# Altium PCB PCB.PcbDoc
Units mm, origin at the board's own origin, x right, y up, seen from the top; angles counter-clockwise.
Board outline 40 x 70 mm, 2 copper layers (Top Layer, Bottom Layer), stack 1.571 mm thick; 31 components, 24 nets, 138 pads, 19 vias.
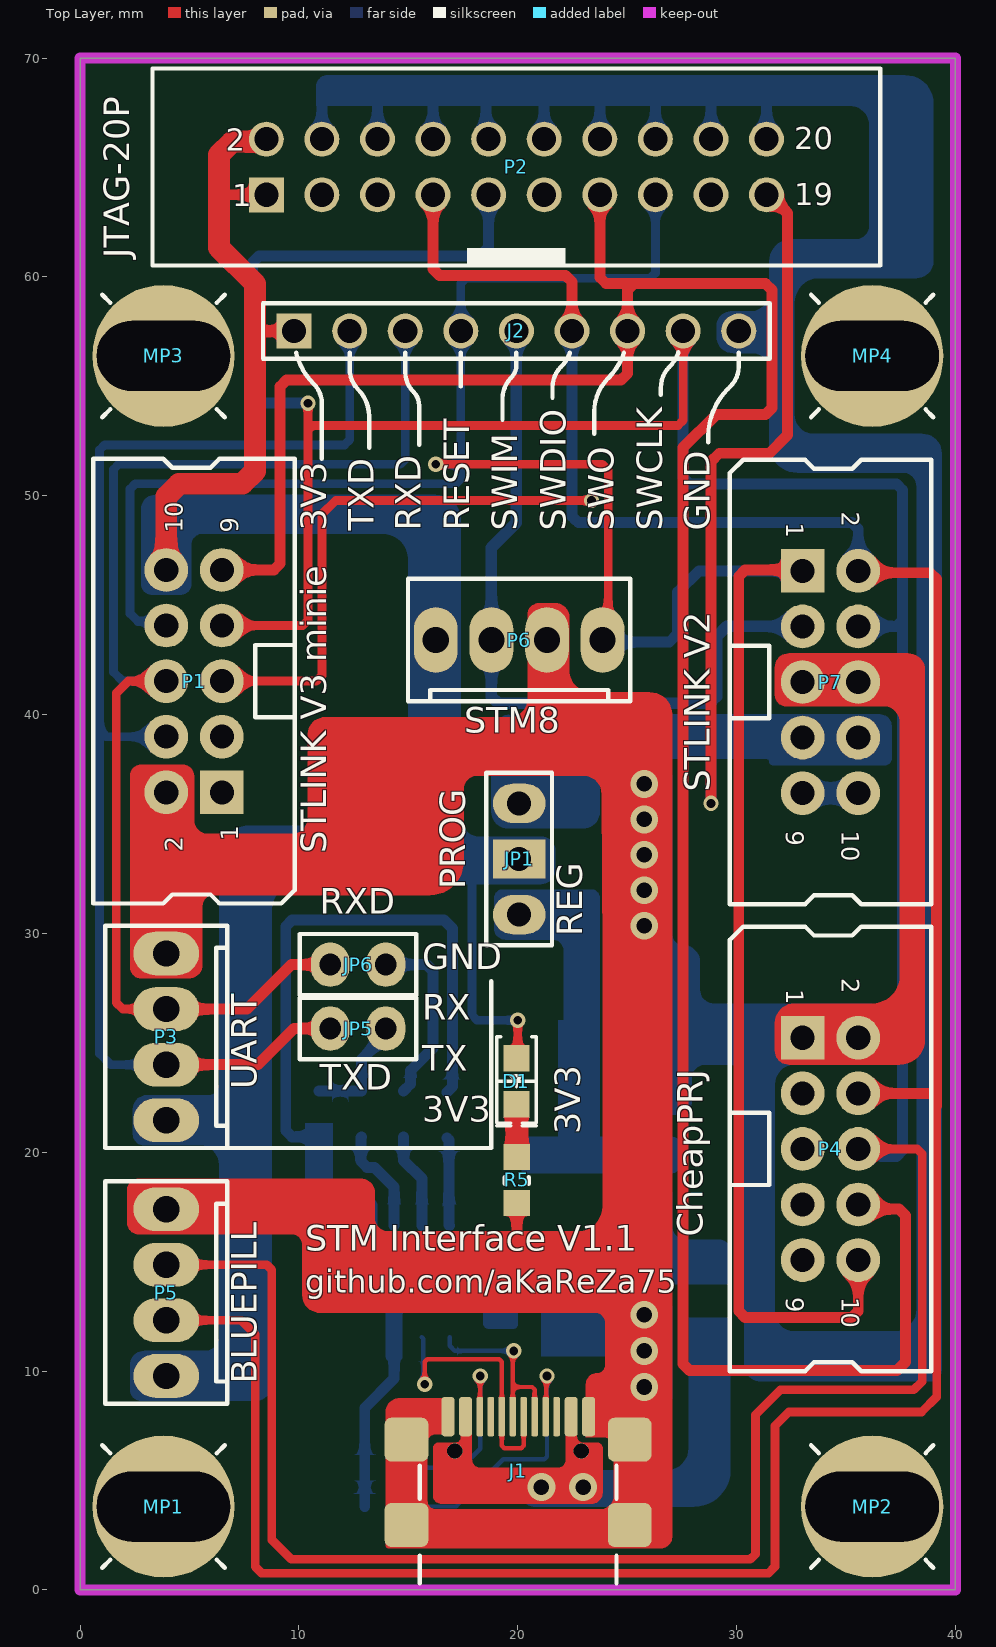
[diagram p0: Top Layer view]
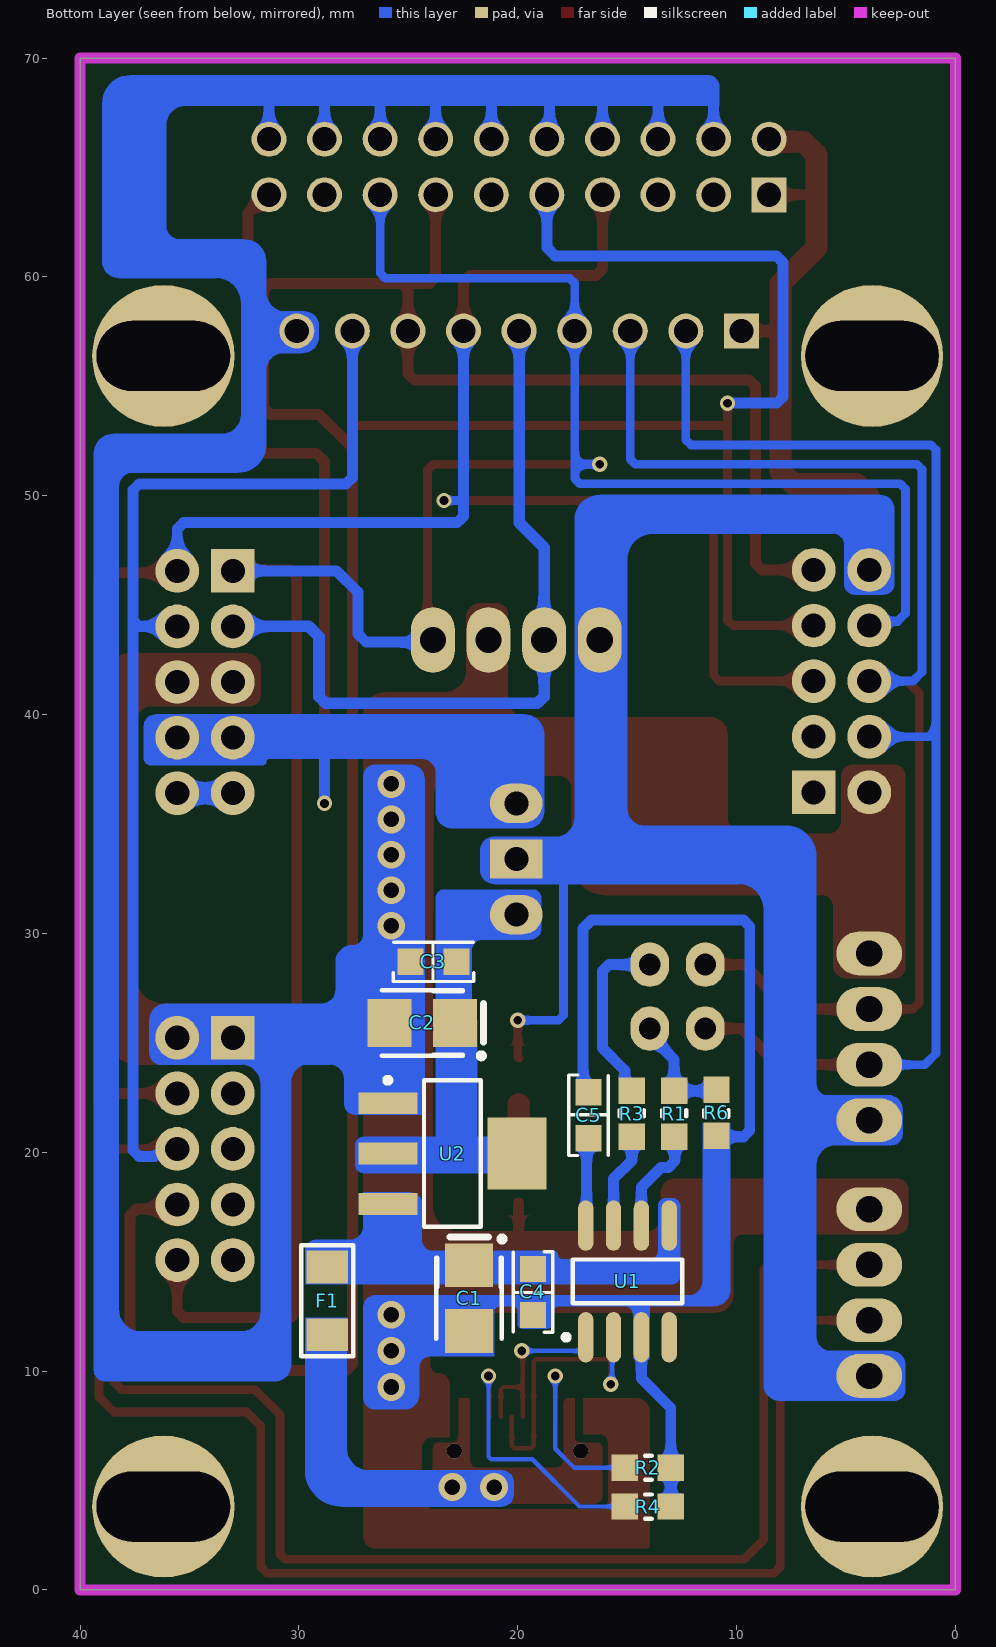
[diagram p1: Bottom Layer view, seen from below]
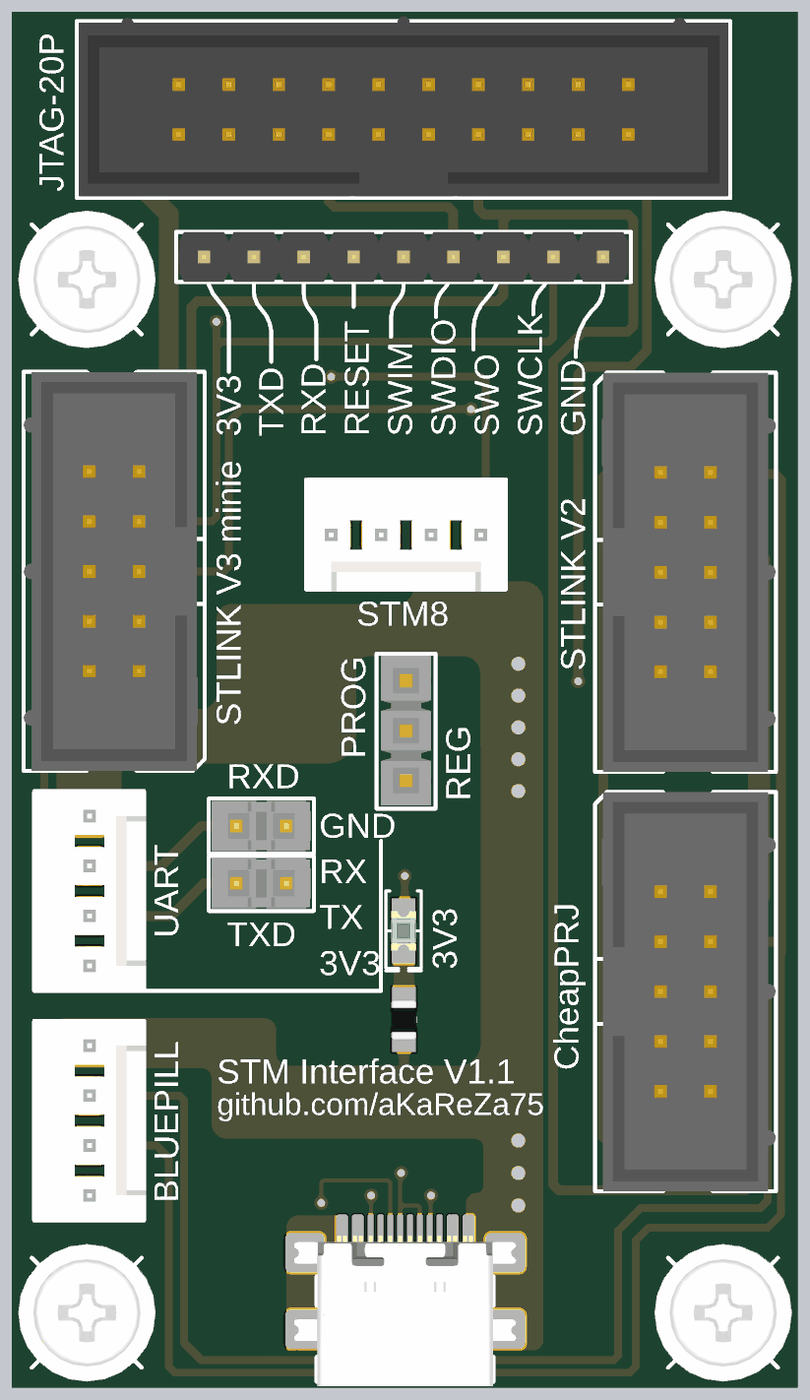
[diagram p2: 3D render of the assembled board from above, using the file's embedded part models]
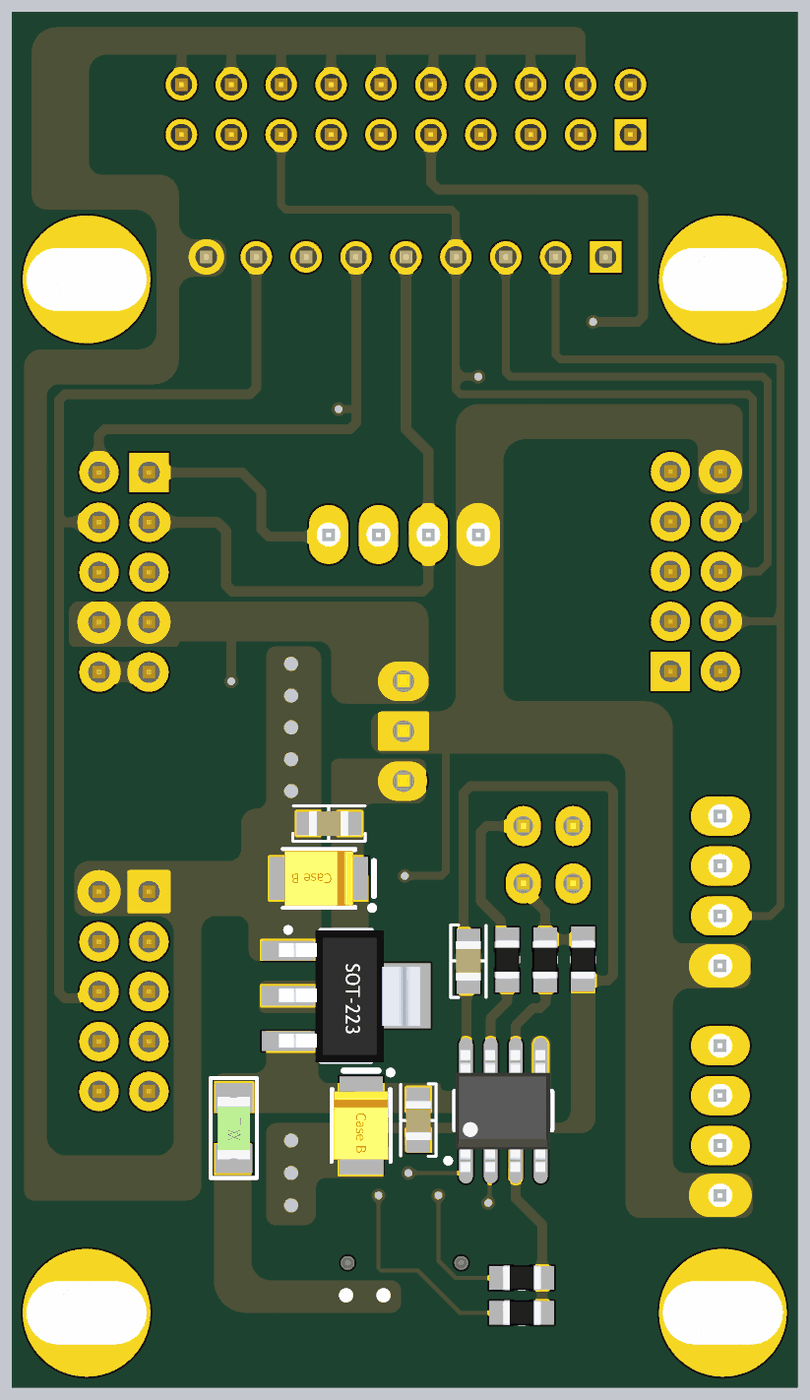
[diagram p3: 3D render of the assembled board from below, using the file's embedded part models]

## Layer stack, top to bottom
Top Solder: solder mask 0.0102, Solder Resist, Dk 3.5
Top Layer: signal copper 0.0356
Dielectric 1: dielectric 1.5, FR-4, Dk 4.8
Bottom Layer: signal copper 0.0356
Bottom Solder: solder mask 0.0102, Solder Resist, Dk 3.5

## Board outline
0,0 0,70 40,70 40,0

## Design rules (kind name [scope] priority, off if disabled: settings)
AcuteAngle [All] p1: minimum=6.00000000000000E+0001 checktracksonly=TRUE
AssemblyTestPointUsage [All] p1 off:
AssemblyTestpoint [All] p1 off: testpointundercomponent=TRUE minsize=1.016 maxsize=2.54 preferedsize=1.524 minholesize=0 maxholesize=1.016 preferedholesize=0.813 testpointgrid=0.025 usegrid=TRUE gridtolerance=0 allowsidetop=TRUE allowsidebottom=TRUE
BoardOutlineClearance [All] p1: gap=0.2 ignorepadtopadclearanceinfootprint=FALSE
Clearance Poly_Clearance [All vs InPolygon] p1: gap=0.25 ignorepadtopadclearanceinfootprint=TRUE except(0.3: Arc-Hole Track-Hole SMDPad-Hole THPad-Hole Via-Hole Fill-Hole Poly-Hole Region-Hole Text-Hole)
Clearance [All] p2: gap=0.2 ignorepadtopadclearanceinfootprint=FALSE except(0.3: Arc-Hole Track-Hole SMDPad-Hole THPad-Hole Via-Hole Fill-Hole Poly-Hole Region-Hole Text-Hole)
FabricationTestPointUsage [All] p1 off: valid=0 allowmultiple=FALSE
FabricationTestpoint [All] p1 off: side=3 testpointundercomponent=TRUE minsize=1.016 maxsize=2.54 preferedsize=1.524 minholesize=0 maxholesize=1.016 preferedholesize=0.813 testpointgrid=0.025 allowsidetop=TRUE allowsidebottom=TRUE usegrid=TRUE gridtolerance=0
HoleSize [All] p1: absolutevalues=TRUE maxlimit=10 minlimit=0.4 maxpercent=80.000 minpercent=20.000
HoleToHoleClearance [All] p1: gap=0.3 allowstackedmicrovias=TRUE
MinimumAnnularRing [All] p1: minimumring=0.15
MinimumSolderMaskSliver [All] p1: minsoldermaskwidth=0.01
PolygonConnect [All] p1: thpad.connectstyle=Relief thpad.reliefconductorwidth=0.4 thpad.reliefentries=4 thpad.polygonreliefangle="90 Angle" thpad.airgapwidth=0.4 smdpad.connectstyle=Relief smdpad.reliefconductorwidth=0.4 smdpad.reliefentries=4 smdpad.polygonreliefangle="90 Angle" smdpad.airgapwidth=0.4 via.connectstyle=Direct via.reliefconductorwidth=0.254 via.reliefentries=4 via.polygonreliefangle="90 Angle" via.airgapwidth=0.254
RoutingVias [All] p1: holewidth=0.4 width=0.7 viastyle="Through Hole" minholewidth=0.4 minwidth=0.7 maxholewidth=3 maxwidth=6
SMDNeckDown [All] p1: percent=50.000
SilkToSilkClearance [All] p1: silktosilkclearance=0
SilkToSolderMaskClearance [IsPad] p1: minsilkscreentomaskgap=0.01 clearancetoexposedcopper=TRUE
SolderMaskExpansion [All] p1: expansion=0.102 istentingtop=FALSE
Width [All] p1: maxlimit=10 minlimit=0.2 preferedwidth=0.4
21 further rules are at their usual default settings.

## Components (designator, comment, footprint, x,y, rotation, side; value= is the part's Value field where it differs from the comment)
C1 "10u" SMT_C_Tantalum_B 22.225,13.335 r270 bottom
C2 "10u" SMT_C_Tantalum_B 24.363,25.908 r0 bottom
C3 "100n" "CAP 0805/2012" 23.876,28.702 r0 bottom
C4 "DS1307" "CAP 0805/2012" 19.304,13.589 r270 bottom value=100n
C5 "10n" "CAP 0805/2012" 16.764,21.717 r90 bottom
D1 "Green" "LED 0805/2012 GREEN" 19.939,23.241 r270 top
F1 "0.25A" 1206_F 28.702,13.208 r90 bottom
J1 "16b" "USBC_SMD_16_USB4110 - Extended" 19.812,7.112 r180 top locked
J2 "9" HDR_THT_9M_2.54mm 19.939,57.531 r0 top
JP1 "0b" "jumper selector" 20.066,30.861 r90 top
JP5 "2'Pin" "Jumper Small - 2.54 - GRAY" 12.7,25.654 r180 top
JP6 "2'Pin" "Jumper Small - 2.54 - GRAY" 12.7,28.575 r180 top
MP1 "M3" SCREW-M3 3.81,3.81 r0 top
MP2 "M3" SCREW-M3 36.195,3.81 r0 top
MP3 "M3" SCREW-M3 3.81,56.388 r0 top
MP4 "M3" SCREW-M3 36.195,56.388 r0 top
P1 "STLinkV3-minie" IDC2.54-10PIN 5.207,41.529 r90 top
P2 "JTAG-20P" BOX-HDR-10X2-2.54mm-S 19.939,65.024 r0 top
P3 "UART" "MOLEX KK 0022272041" 3.937,25.273 r90 top
P4 "STLINK V2" IDC2.54-10PIN 34.29,20.153 r270 top
P5 "BluePill" "MOLEX KK 0022272041" 3.937,13.589 r90 top
P6 "STM8" "MOLEX KK 0022272041" 20.066,43.407 r0 top
P7 "STLinkV2" IDC2.54-10PIN 34.29,41.489 r270 top
R1 "560b" "RES 0805 (2012X06L)" 12.854,22.606 r270 bottom
R2 "4.7K" "RES 0805 (2012X06L)" 13.208,5.588 r0 bottom
R3 "560b" "RES 0805 (2012X06L)" 14.786,22.606 r270 bottom
R4 "4.7K" "RES 0805 (2012X06L)" 13.208,3.81 r0 bottom
R5 "220b" "RES 0805 (2012X06L)" 19.958,17.882 r90 top
R6 "1K" "RES 0805 (2012X06L)" 10.922,20.955 r90 bottom
U1 "CH340N" SO8_narrow_m 14.986,14.097 r90 bottom
U2 "AMS1117-3V3" SOT223_M 22.987,19.939 r180 bottom

## Footprints (in the part's own frame and the unit in brackets; to place one, negate y for a bottom-side part, rotate by r counter-clockwise, add the part's x,y. Pads: shape width x height; smd on the part's side, far side on the other; paste and mask are expansions set on the pad)
1206_F [mm] "Surface mount FUSE 1206"
  rect 1.5x1.9 smd: 1(-1.55,0) 2(1.55,0)
  silkscreen extent -2.54,-1.18 2.54,1.18, body extent -1.6,-0.83 1.6,0.83, height 0.56
BOX-HDR-10X2-2.54mm-S [mm] "20 pins, straight, gold plating"
  rect 1.6x1.6 hole 1.1: 1(-11.43,-1.27)
  round 1.6 hole 1.1: 2(-11.43,1.27) 3(-8.89,-1.27) 4(-8.89,1.27) 5(-6.35,-1.27) 6(-6.35,1.27) 7(-3.81,-1.27) 8(-3.81,1.27) 9(-1.27,-1.27) 10(-1.27,1.27) 11(1.27,-1.27) 12(1.27,1.27) 13(3.81,-1.27) 14(3.81,1.27) 15(6.35,-1.27) 16(6.35,1.27) 17(8.89,-1.27) 18(8.89,1.27) 19(11.43,-1.27) 20(11.43,1.27)
  silkscreen extent -16.63,-4.5 16.63,4.5, body extent -16.53,-4.42 16.53,4.75, height 9.13
"CAP 0805/2012" [mm] "Chip Capacitor, 2-Leads, Body 2.00x1.20mm, IPC Medium Density"
  rect 1.2x1.2 smd: 1(-1.075,0) 2(1.025,0)
  silkscreen extent -1.86,-0.9 1.82,0.9, body extent -1,-0.64 1,0.64, height 1.26
HDR_THT_9M_2.54mm [mm] "Pin Header, pitch 2.54 mm, THT, Vertical, single row, 9p"
  rect 1.6x1.6 hole 1.1: 1(-10.16,0)
  round 1.6 hole 1.1: 2(-7.62,0) 3(-5.08,0) 4(-2.54,0) 5(0,0) 6(2.54,0) 7(5.08,0) 8(7.62,0) 9(10.16,0)
  silkscreen extent -11.58,-1.27 11.58,1.27, body extent -11.43,-1.27 11.43,1.27, height 8.57
IDC2.54-10PIN [mm] "Connector; IDC, Low Profile Male Header, Thru-Hole; 10 Position; Vertical; Pitch 2.54 mm; 20.32 x 9.2 x 9.45 mm (LxWxH) DESIGNER : ABBAS BASEREH"
  rect 2x2 hole 1.1: 1(-5.08,-1.27)
  round 2 hole 1.1: 2(-5.08,1.27) 3(-2.54,-1.27) 4(-2.54,1.27) 5(0,-1.27) 6(0,1.27) 7(2.54,-1.27) 8(2.54,1.27) 9(5.08,-1.27) 10(5.08,1.27)
  silkscreen extent -10.16,-4.6 10.16,4.6, body extent -10.15,-4.25 10.15,4.6, height 9.17
"jumper selector" [mm]
  oval 1.8x2.4 hole 1.1: 1(0,0) 3(5.08,0)
  rect 1.8x2.4 hole 1.1: 2(2.54,0)
  silkscreen extent -1.4,-1.5 6.48,1.5, body extent -1.24,-1.27 6.38,1.27, height 10.16
"Jumper Small - 2.54 - GRAY" [mil]
  oval 70x80 hole 39.37: 1(-50,0) 2(50,0)
  silkscreen extent -105,-55 105,55, body extent -100,-50 100,50, height 337
"LED 0805/2012 GREEN" [mm] "Chip Diode, 2-Leads, Body 2.00x1.25mm, IPC Medium Density"
  rect 1.2x1.2 smd: 1(-1.05,0) 2(1.05,0)
  silkscreen extent -2.03,-0.9 2.03,0.9, body extent -1,-0.62 1,0.63, height 0.9
"MOLEX KK 0022272041" [mm]
  oval 2x3 hole 1.2: 1(-3.81,0) 2(-1.27,0) 3(1.27,0) 4(3.81,0)
  silkscreen extent -5.08,-2.79 5.08,2.79, body extent -5.08,-2.9 5.08,2.9, height 11.7
"RES 0805 (2012X06L)" [mm] "Chip Resistor, 2-Leads, Body 2.0x1.3mm, IPC High Density _ (0.100 W)"
  rect 1.2x1.2 smd: 1(-0.2,0) 2(1.9,0)
  silkscreen extent 0.67,-0.55 0.98,0.55, body extent -0.19,-0.63 1.84,0.64, height 0.6
SCREW-M3 [mm]
  round 6.5 hole 3.2 slot 6.096 at 0 deg: 1(0,0)
  silkscreen extent -2.79,-2.79 2.79,2.79, body extent -3.49,-3.5 3.51,3.5, height 2.32
SMT_C_Tantalum_B [mm] "Capacitor, SM Tantalum; Body 3.5 x 2.8 mm (LxW typ)"
  rect 2x2.2 smd: 1(-1.5,0) 2(1.5,0)
  silkscreen extent -2.82,-1.5 1.85,1.62, body extent -1.75,-1.4 1.75,1.4, height 1.9
SO8_narrow_m [mm] "8-Pin Small Outline Package (SO8), IPC Low Density"
  oval 2.3x0.7 smd: 1(-2.55,1.905) 2(-2.55,0.635) 3(-2.55,-0.635) 4(-2.55,-1.905) 5(2.55,-1.905) 6(2.55,-0.635) 7(2.55,0.635) 8(2.55,1.905)
  silkscreen extent -2.67,-2.5 1,2.93, body extent -3.12,-2.39 3.07,2.44, height 1.7
SOT223_M [mm] "SOT223, 4-Leads, Body 6.5x3.5mm, Pitch 2.3mm, Lead Span 7mm, IPC Low Density"
  rect 2.7x1 smd: 1(-2.95,2.3) 2(-2.95,0) 3(-2.95,-2.3)
  rect 2.7x3.3 smd: 4(2.95,0)
  silkscreen extent -3.08,-3.35 1.3,3.47, body extent -3.42,-3.38 3.78,3.32, height 1.85
"USBC_SMD_16_USB4110 - Extended" [mm] "CONN, USB, Type C, USB4110"
  rrect50% 0.6x1.8 smd mask+0.075: A1B12(2.997,-0.805) A4B9(2.197,-0.805) B1A12(-3.428,-0.805) B4A9(-2.628,-0.805)
  rrect50% 0.3x1.8 smd mask+0.075: A5(1.043,-0.805) A6(0.041,-0.805) A7(-0.46,-0.805) A8(-1.461,-0.805) B5(-1.962,-0.805) B6(-0.961,-0.805) B7(0.542,-0.805) B8(1.544,-0.805)
  rrect30% 2x2 smd: S1(4.897,0.244) S2(-5.303,0.244) S3(4.897,4.144) S4(-5.303,4.144)
  round 0.7 hole 0.7 unplated: ""(-3.093,0.764) ""(2.687,0.764)
  silkscreen extent -4.7,1.45 4.3,6.81, body extent -5.85,-0.64 5.45,7.04, height 3.23

## Part data
C1 C2: library part Cap_Tantalum, "Tantalum Capacitor,TAJ Series-SMD", Package=Package?, Rating=6.3V, Inflow=inflow?, Type=Tantalum, Validation=Valid
C3 C4 C5: library part Cap_Multi_SMD_100nF_0805, "Bipolar ceramic capacitor SMD", Package=0805, Rating=50V, Inflow=inflow?, Type=MultiLayer
  C3: Validation=Valid
D1: library part Semi_LED_SMD, "LED", Package=Package?, Rating=Rating?, Inflow=inflow?, Type=LED, Validation=Valid
F1: library part Other_Elec_Fuse_SMD, "Short circiut  protection", Package=1206, Rating=Rating?, Inflow=0.5A, Type=Fast
J1: library part Con_USB_C_16P, "USB C Female Connector", Package=SMD, Rating=Rating?, Inflow=inflow?, Type=C, Validation=NT
J2: library part Con_MPH_9x1_V_THT_2.54, "Header, single row, 9 pin", Package=Package?, Rating=Rating?, Inflow=7152, Type=Type?, Validation=NT
JP1: library part SW_Other_JSelector_THT, "Jumper Selector", Package=Dip, Rating=Rating?, Inflow=5145, Type=Selector, Validation=Valid
JP5 JP6: library part SW_Other_Jumper, "Jumper", Package=Package?, Rating=Rating?, Inflow=5145, Type=Type?, Validation=Valid
MP1 MP2 MP3 MP4: library part Other_Mech_Screw, "Board Screw With Spacer", Package=Package?, Rating=Rating?, Inflow=8243, Type=Screw, Validation=Valid
P1: library part Con_Prog_STLinkV3_SWD, "STLINK-V3MINIE debugger/programmer IDC probe for STM32 microcontrollers", Package=Package?, Rating=Rating?, Inflow=7119, Type=SWD, Validation=NT
P2: library part Con_Prog_JTAG_20, "20 Pin Standard JTAG Header For ARM JLINK", Package=Package?, Rating=Rating?, Inflow=7134, Type=Type?, Validation=NT
P3: library part Con_UART, "UART Connector", Package=Package?, Rating=Rating?, Inflow=4528, Type=Type?, Validation=NT
P4: library part Con_Prog_CheapProject, "STLINK-V2 debugger/programmer IDC probe for STM32 microcontrollers", Package=Package?, Rating=Rating?, Inflow=7119, Type=SWD, Validation=NT
P5: library part Con_Prog_BluePill, "Serial Wire 4'pin", Package=Package?, Rating=Rating?, Inflow=4528, Type=Type?, Validation=NT
P6: library part Con_Prog_STM8, "STM8 Programmer Connector", Package=Package?, Rating=Rating?, Inflow=4528, Type=Type?, Validation=NT
P7: library part Con_Prog_STLinkV2, "STLINK-V2 debugger/programmer IDC probe for STM32 microcontrollers", Package=Package?, Rating=Rating?, Inflow=7119, Type=SWD, Validation=NT
R1 R2 R3 R4 R5 R6: library part Res_SMD_0805, "Resistor", Package=0805, Rating=0.125W, Inflow=inflow?, Type=10%
  R5: Validation=Valid
U1: library part IC_Converter_CH340N, "TTL To USB Chip", Package=SO-8, Rating=Rating?, Inflow=inflow?, Type="USB to TTL"
U2: library part IC_Reg_AMS1117_3.3, "1'A Positive voltage regulator", Package=SOT223, Rating=1A, Inflow=5217, Type=LDO, Validation=Valid

## Via types
v1: diameter 1.27, hole 0.711, Top Layer to Bottom Layer, tented both sides, 10 vias
v2: diameter 0.7, hole 0.4, Top Layer to Bottom Layer, tented both sides, 9 vias

## Nets (pads, with @x,y where several pads share a name; then routed paths per layer and width w, separated by ;. In a path a pad name is that pad's centre, name@x,y a point inside that pad or via, vN(x,y) a via of type N, cw(c..) or ccw(c..) an arc to the next point about the centre after c; other vN are vias at no path point)
+3V3: D1.1 J2.1 JP1.2 P1.10 P2.1 P2.2 P3.1 P5.1 P6.1 | length 59.1
  Top Layer w0.4: D1.1 20,24.352 v2(20,26.035)
  Top Layer w0.5: 6.35,63.627 6.477,63.754 P2.1 ; 8.001,57.531 J2.1
  Top Layer w1: P1.10 3.937,49.96 4.523,50.546 7.415,50.546 8.001,51.132 8.001,57.531 8.001,59.69 6.35,61.341 6.35,63.627 6.35,65.581 6.948,66.179 8.394,66.179 P2.2
  Bottom Layer w0.4: P1.10 3.937,48.26 4.699,49.022 15.387,49.022 16.256,48.153 P6.1 ; 17.907,32.512 17.907,26.269 18.141,26.035 v2(20,26.035)
GND: C1.2 C2.2 C3.2 C4.2 C5.2 J1.A1B12 J1.B1A12 J1.S1 J1.S2 J1.S3 J1.S4 J2.9 P1.2 P2.4 P2.6 P2.8 P2.10 P2.12 P2.14 P2.16 P2.18 P2.20 P3.4 P4.1 P4.2 P5.4 P6.3 P7.5 P7.6 R2.1 R4.1 R5.1 R6.1 U1.3 U2.1 | length 61
  Top Layer w0.5: 19.685,15.875 19.958,15.875 R5.1
  Top Layer w0.8: J1.S3 J1.S1 ; J1.S4 25.115,5.145 ; 25.115,5.168 J1.S2
  Bottom Layer w0.5: R6.1@10.922,20.706 9.691,20.706 9.398,20.999 9.398,30.314 9.691,30.607 16.637,30.607 17.018,30.226 17.018,22.996 C5.2 ; P2.4 11.049,68.128 ; R4.1 R2.1 13.008,8.309 14.351,9.652 U1.3 ; P2.6 13.589,68.072 ; P2.8 16.129,68.072 ; 18.542,68.072 18.542,66.294 P2.10 ; P2.12 21.209,68.023 ; 23.622,68.199 23.749,68.199 P2.14 ; P2.16 26.289,68.072 ; P2.18 28.829,68.072 ; P2.20 31.369,68.072
  other v1: 25.781,9.271 25.781,10.922 25.781,12.573 25.781,30.353 25.781,31.972 25.781,33.591 25.781,35.211 25.781,36.83
NetC2_1: C2.1 C3.1 JP1.1 U2.2 U2.4
NetC5_1: C5.1 U1.8 | length 4
  Bottom Layer w0.5: C5.1 16.853,20.553 16.853,16.685 U1.8
NetD1_2: D1.2 R5.2 | length 9.7
  Top Layer w1: D1.2 D1.2@19.958,22.191 ; R5.2 D1.2@19.958,22.191 ; R5.2 D1.2@19.958,22.191 ; R5.2 D1.2@19.958,22.191 ; R5.2 D1.2@19.958,22.191
NetF1_1: F1.1 J1. J1.A4B9 J1.B4A9
  other v1: 21.082,4.699 22.987,4.699
NetJ1_A6: J1.A6 J1.B6 U1.1 | length 8.7
  Top Layer w0.2: J1.A6 19.771,9.271 ; v2(19.812,10.922) 19.771,10.881 19.771,9.271 ; J1.B6 20.773,9.154 20.655,9.271 19.771,9.271
  Bottom Layer w0.2: U1.1 16.891,11.153 17.122,10.922 v2(19.812,10.922)
NetJ1_A7: J1.A7 J1.B7 U1.2 | length 13.1
  Top Layer w0.2: v2(15.748,9.398) 15.748,10.424 15.865,10.541 19.153,10.541 19.27,10.424 J1.B7 19.27,6.594 19.387,6.477 20.154,6.477 20.272,6.594 J1.A7
  Bottom Layer w0.2: U1.2 15.684,11.483 15.684,9.461 v2(15.748,9.398)
NetJ1_A8: J1.A8 R4.2 | length 12.8
  Top Layer w0.2: J1.A8 21.305,7.949 21.305,9.748 v2(21.336,9.779)
  Bottom Layer w0.2: R4.2 17.183,3.81 19.342,5.969 21.219,5.969 21.336,6.086 v2(21.336,9.779)
NetJ1_B8: J1.B8 R2.2 | length 8.7
  Top Layer w0.2: J1.B8 18.278,7.927 18.278,9.769 v2(18.288,9.779)
  Bottom Layer w0.2: R2.2 17.426,5.588 18.288,6.45 v2(18.288,9.779)
NetJP5_1: JP5.1 R1.1 R6.2 | length 5.2
  Bottom Layer w0.5: R6.2@10.922,22.806 R1.1 12.854,24.241 13.97,25.357 JP5.1
NetJP6_1: JP6.1 R3.1 | length 8.3
  Bottom Layer w0.5: JP6.1 15.836,28.575 16.129,28.282 16.129,24.765 15.108,23.744 15.108,23.128 R3.1
NetP7_9,10: P7.9 P7.10 | length 2.5
  Bottom Layer w1: P7.9 P7.10
NetR1_2: R1.2 U1.6 | length 4.9
  Bottom Layer w0.5: R1.2 12.827,20.679 12.827,19.597 13.12,19.304 13.462,19.304 14.351,18.415 U1.6
NetR3_2: R3.2 U1.7 | length 4.4
  Bottom Layer w0.5: R3.2 14.786,19.631 15.621,18.796 U1.7
RESET: J2.4 P1.8 P2.15 P4.10 P6.4 P7.1 | length 117.8
  Top Layer w0.4: v2(16.256,51.435) 23.862,51.435 24.13,51.167 24.13,43.661 P6.4
  Top Layer w0.5: P7.1 32.98,46.609 30.392,46.609 30.099,46.316 30.099,12.739 30.392,12.446 35.267,12.446 35.56,12.739 P4.10
  Bottom Layer w0.4: P1.8 3.748,44.258 2.644,44.258 2.286,44.616 2.286,50.312 2.52,50.546 17.165,50.546 17.399,50.78 17.399,51.435 ; v2(16.256,51.435) 17.399,51.435 ; P2.15 26.289,60.178 26.055,59.944 17.633,59.944 17.399,59.71 J2.4 17.399,51.435
  Bottom Layer w0.5: P6.4 23.976,43.307 26.924,43.307 27.305,43.688 27.305,45.593 28.281,46.569 P7.1
RXD: J2.3 JP6.2 P1.6 P3.3 | length 58.8
  Top Layer w0.4: P3.3 1.944,26.543 1.651,26.836 1.651,40.982 2.198,41.529 P1.6
  Top Layer w0.5: P3.3 7.62,26.543 9.652,28.575 JP6.2
  Bottom Layer w0.4: P3.3 P3.3@4.064,26.416 ; P1.6 1.944,41.529 1.524,41.949 1.524,51.201 1.758,51.435 14.625,51.435 14.859,51.669 J2.3
SWCLK: J2.8 P1.7 P2.9 P4.6 P5.3 P7.4 | length 177.3
  Top Layer w0.4: P5.3 8.529,14.859 8.763,14.625 8.763,2.286 9.652,1.397 30.627,1.397 30.861,1.631 30.861,8.001 32.004,9.144 38.1,9.144 38.481,9.525 38.481,19.919 38.247,20.153 P4.6 ; P1.7 10.18,44.069 10.414,44.303 10.414,52.979 ; v2(10.414,54.229) 10.414,52.979 ; J2.8 27.559,53.447 27.325,53.213 10.648,53.213 10.414,52.979
  Bottom Layer w0.5: v2@10.42,54.229 8.167,54.229 7.874,54.522 7.874,60.667 8.167,60.96 18.288,60.96 18.669,61.341 P2.9 ; J2.8 27.559,50.839 27.852,50.546 37.299,50.546 37.592,50.253 37.592,44.322 ; P4.6 35.56,19.812 35.614,19.866 36.549,19.866 36.603,19.812 37.299,19.812 37.592,20.105 37.592,44.322 ; P7.4 37.299,44.029 37.592,44.322
SWDIO: J2.6 P1.5 P2.7 P4.4 P5.2 P7.2 | length 159.5
  Top Layer w0.4: P5.2 7.366,12.319 8.001,11.684 8.001,1.055 8.294,0.762 31.457,0.762 31.75,1.055 31.75,7.493 32.385,8.128 38.45,8.128 39.142,8.819 39.142,22.119 ; P1.5 10.795,41.529 11.049,41.783 11.049,49.149 11.684,49.784 v2(23.368,49.784) ; 39.029,22.693 39.142,22.58
  Top Layer w0.5: P2.7 16.129,60.364 16.422,60.071 22.186,60.071 22.479,59.778 J2.6 ; P4.4 39.029,22.693 ; P7.2 35.647,46.482 38.849,46.482 39.142,46.189 39.142,22.119
  Bottom Layer w0.4: 22.479,49.784 v2(23.368,49.784) ; 22.645,48.895 22.772,48.768
  Bottom Layer w0.5: J2.6 22.479,49.784 22.479,49.061 22.645,48.895 ; 22.772,48.768 35.267,48.768 35.56,48.475 P7.2
SWIM: J2.5 P6.2 P7.3 | length 34.6
  Bottom Layer w0.53: J2.5 19.939,48.768 18.796,47.625 P6.2 18.796,40.823 19.106,40.513 28.773,40.513 29.083,40.823 29.083,43.561 29.551,44.029 P7.3
SWO: J2.7 P1.9 P2.13 P4.8 | length 114.7
  Top Layer w0.5: P1.9 8.851,46.609 9.144,46.902 9.144,54.991 9.437,55.284 24.726,55.284 25.019,55.577 J2.7 25.019,59.397 25.312,59.69 ; P2.13 23.749,59.983 24.042,59.69 25.312,59.69 ; P4.8 35.774,17.399 37.426,17.399 37.719,17.106 37.719,10.414 37.338,10.033 27.852,10.033 27.559,10.326 27.559,52.197 29.083,53.721 31.33,53.721 31.623,54.014 31.623,59.397 31.33,59.69 25.312,59.69
TXD: J2.2 JP5.2 P1.4 P3.2 | length 58.8
  Top Layer w0.5: P3.2 8.128,24.003 9.779,25.654 JP5.2
  Bottom Layer w0.4: P3.2 1.397,24.003 0.889,24.511 0.889,39.282 ; P1.4 1.182,38.989 0.889,39.282 ; J2.2 12.319,52.558 12.085,52.324 1.123,52.324 0.889,52.09 0.889,39.282
VProg: JP1.3 P2.19 P7.7 P7.8 | length 36
  Top Layer w0.5: v2(28.829,35.941) 28.829,51.562 29.21,51.943 31.496,51.943 32.323,52.77 32.323,62.93 31.499,63.754 P2.19
  Bottom Layer w0.5: v2(28.829,35.941) 28.829,38.354
  Bottom Layer w1: P7.7 P7.8
Vusb: C1.1 C4.1 F1.2 U1.5 U2.3
pads on no net: J1.A5 J1.B5 MP1.1 MP2.1 MP3.1 MP4.1 P1.1 P1.3 P2.3 P2.5 P2.11 P2.17 P4.3 P4.5 P4.7 P4.9 U1.4

## Keep-outs
Keep-Out Layer:
  the board outline again, w0.5

## Other copper
Top Layer:
  region net GND: 26.543,1.905 ccw(c26.543,2.413) 27.051,2.413 27.051,6.985 27.051,9.906 27.051,11.43 27.051,40.005 ccw(c26.035,40.005) 26.035,41.021 23.368,41.021 cw(c23.368,42.037) 22.352,42.037 22.352,44.45 ccw(c21.717,44.45) 21.717,45.085 20.955,45.085 ccw(c20.955,44.577) 20.447,44.577 20.447,40.706 cw(c19.619,40.706) 19.619,39.878 11.176,39.878 ccw(c11.176,39.116) 10.414,39.116 10.414,35.306 cw(c9.652,35.306) 9.652,34.544 5.842,34.544 cw(c5.842,35.179) 5.207,35.179 5.207,37.211 ccw(c4.699,37.211) 4.699,37.719 2.794,37.719 ccw(c2.794,37.211) 2.286,37.211 2.286,28.448 ccw(c2.794,28.448) 2.794,27.94 4.953,27.94 ccw(c4.953,28.575) 5.588,28.575 5.588,31.242 cw(c6.096,31.242) 6.096,31.75 16.002,31.75 ccw(c16.002,33.274) 17.526,33.274 17.526,36.576 cw(c18.161,36.576) 18.161,37.211 21.463,37.211 22.984,37.211 cw(c22.984,36.358) 23.837,36.363 23.876,29.083 23.876,17.526 cw(c22.733,17.526) 22.733,16.383 14.097,16.383 cw(c14.097,17.018) 13.462,17.018 13.462,18.161 ccw(c12.827,18.161) 12.827,18.796 2.667,18.796 ccw(c2.667,18.288) 2.159,18.288 2.159,16.764 ccw(c2.667,16.764) 2.667,16.256 9.652,16.256 cw(c9.652,15.748) 10.16,15.748 10.16,13.462 ccw(c10.961,13.462) 10.961,12.661 23.534,12.661 cw(c23.535,12.192) 24.003,12.192 24.003,10.287 cw(c23.622,10.287) 23.622,9.906 ccw(c23.622,9.398) 23.114,9.398 23.114,6.985 23.876,6.985 cw(c23.876,6.477) 24.384,6.477 24.384,4.318 cw(c23.749,4.318) 23.749,3.683 16.256,3.683 cw(c16.256,4.064) 15.875,4.064 15.875,6.731 cw(c16.256,6.731) 16.256,7.112 17.018,7.112 17.018,8.763 14.605,8.763 ccw(c14.605,8.128) 13.97,8.128 13.97,2.032 ccw(c14.097,2.032) 14.097,1.905
  region net GND: 32.385,24.003 37.465,24.003 ccw(c37.465,25.146) 38.608,25.146 38.608,42.037 ccw(c37.846,42.037) 37.846,42.799 32.385,42.799 ccw(c32.385,42.164) 31.75,42.164 31.75,40.894 ccw(c32.258,40.894) 32.258,40.386 36.703,40.386 cw(c36.703,39.624) 37.465,39.624 37.465,28.067 cw(c36.195,28.067) 36.195,26.797 32.639,26.797 ccw(c32.639,25.908) 31.75,25.908 31.75,24.638 ccw(c32.385,24.638)
  region net NetF1_1: 16.129,4.318 ccw(c16.51,4.318) 16.51,3.937 19.746,3.937 23.368,3.937 ccw(c23.368,4.445) 23.876,4.445 23.876,6.477 ccw(c23.622,6.477) 23.622,6.731 22.987,6.731 cw(c22.987,7.013) 22.705,7.013 22.705,8.755 22.197,8.755 22.197,5.941 cw(c21.844,5.941) 21.844,5.588 18.288,5.588 cw(c18.288,5.969) 17.907,5.969 17.907,8.509 ccw(c17.653,8.509) 17.653,8.763 17.399,8.763 17.399,6.985 cw(c17.145,6.985) 17.145,6.731 16.383,6.731 ccw(c16.383,6.477) 16.129,6.477
Bottom Layer:
  region net GND: 24.257,21.717 27.432,21.717 ccw(c27.432,22.225) 27.94,22.225 27.94,23.368 cw(c28.575,23.368) 28.575,24.003 29.591,24.003 cw(c29.591,23.241) 30.353,23.241 30.353,10.287 ccw(c31.115,10.287) 31.115,9.525 38.862,9.525 ccw(c38.862,10.033) 39.37,10.033 39.37,51.943 ccw(c38.481,51.943) 38.481,52.832 33.528,52.832 cw(c33.528,53.721) 32.639,53.721 32.639,58.801 cw(c33.782,58.801) 33.782,59.944 38.227,59.944 ccw(c38.227,60.706) 38.989,60.706 38.989,67.945 ccw(c37.719,67.945) 37.719,69.215 11.303,69.215 ccw(c11.303,68.707) 10.795,68.707 10.795,67.818 35.179,67.818 cw(c35.179,66.929) 36.068,66.929 36.068,62.357 cw(c35.433,62.357) 35.433,61.722 32.512,61.722 ccw(c32.512,60.706) 31.496,60.706 31.496,59.309 cw(c30.607,59.309) 30.607,58.42 29.718,58.42 ccw(c29.718,57.785) 29.083,57.785 29.083,57.277 ccw(c29.845,57.277) 29.845,56.515 30.734,56.515 cw(c30.734,55.753) 31.496,55.753 31.496,52.324 ccw(c32.766,52.324) 32.766,51.054 37.592,51.054 cw(c37.592,50.419) 38.227,50.419 38.227,12.827 cw(c37.211,12.827) 37.211,11.811 32.639,11.811 cw(c32.639,12.7) 31.75,12.7 31.75,23.114 cw(c32.639,23.114) 32.639,24.003 36.322,24.003 ccw(c36.322,24.511) 36.83,24.511 36.83,26.035 ccw(c36.068,26.035) 36.068,26.797 28.956,26.797 cw(c28.956,27.432) 28.321,27.432 28.321,28.702 ccw(c27.559,28.702) 27.559,29.464 cw(c27.559,29.972) 27.051,29.972 27.051,37.211 ccw(c26.543,37.211) 26.543,37.719 24.892,37.719 ccw(c24.892,37.084) 24.257,37.084
  region net VProg: 19.558,34.798 22.987,34.798 ccw(c22.987,35.56) 23.749,35.56 23.749,37.338 cw(c24.384,37.338) 24.384,37.973 31.369,37.973 cw(c31.369,37.846) 31.496,37.846 ccw(c31.65,37.846) 31.65,37.692 36.803,37.692 ccw(c36.803,37.973) 37.084,37.973 37.084,39.497 ccw(c36.576,39.497) 36.576,40.005 19.685,40.005 ccw(c19.685,39.116) 18.796,39.116 18.796,35.56 ccw(c19.558,35.56)
  region net +3V3: 2.794,8.636 8.001,8.636 ccw(c8.001,9.398) 8.763,9.398 8.763,11.049 8.763,31.115 cw(c9.906,31.115) 9.906,32.258 21.082,32.258 ccw(c21.082,32.893) 21.717,32.893 21.717,33.782 ccw(c21.082,33.782) 21.082,34.417 18.288,34.417 cw(c18.288,35.306) 17.399,35.306 17.399,48.895 ccw(c16.256,48.895) 16.256,50.038 3.429,50.038 ccw(c3.429,49.403) 2.794,49.403 2.794,45.974 ccw(c3.302,45.974) 3.302,45.466 4.572,45.466 ccw(c4.572,45.974) 5.08,45.974 5.08,47.752 cw(c5.588,47.752) 5.588,48.26 13.843,48.26 cw(c13.843,47.117) 14.986,47.117 14.986,35.687 cw(c14.224,35.687) 14.224,34.925 7.747,34.925 ccw(c7.747,33.528) 6.35,33.528 6.35,23.114 cw(c5.842,23.114) 5.842,22.606 3.048,22.606 ccw(c3.048,21.971) 2.413,21.971 2.413,20.828 ccw(c2.921,20.828) 2.921,20.32 5.461,20.32 cw(c5.461,19.431) 6.35,19.431 6.35,11.557 cw(c5.715,11.557) 5.715,10.922 2.921,10.922 ccw(c2.921,10.287) 2.286,10.287 2.286,9.144 ccw(c2.794,9.144)
  region net GND: 13.97,10.668 ccw(c14.224,10.668) 14.224,10.414 14.478,10.414 ccw(c14.478,10.668) 14.732,10.668 14.732,12.573 cw(c15.113,12.573) 15.113,12.954 18.161,12.954 cw(c18.161,12.7) 18.415,12.7 18.415,12.192 ccw(c18.669,12.192) 18.669,11.938 19.812,11.938 ccw(c19.812,12.126) 20,12.126 20,12.761 cw(c20.193,12.761) 20.193,12.954 20.828,12.954 cw(c20.828,12.7) 21.082,12.7 21.082,10.668 23.495,10.668 23.495,13.081 ccw(c23.114,13.081) 23.114,13.462 14.859,13.462 14.478,13.462 12.192,13.462 cw(c12.192,14.097) 11.557,14.097 11.557,21.336 10.287,21.336 10.287,13.716 ccw(c11.049,13.716) 11.049,12.954 13.97,12.954
  region net NetF1_1: 20.701,3.81 28.067,3.81 ccw(c28.067,5.461) 29.718,5.461 29.718,12.446 27.813,12.446 27.813,6.477 cw(c26.797,6.477) 26.797,5.461 23.368,5.461 22.225,5.461 20.701,5.461 ccw(c20.701,4.953) 20.193,4.953 20.193,4.318 ccw(c20.701,4.318)
  region net NetC2_1: 20.193,19.05 27.051,19.05 ccw(c27.051,19.431) 27.432,19.431 27.432,20.32 ccw(c27.051,20.32) 27.051,20.701 26.67,20.701 23.749,20.701 23.749,29.972 23.749,31.623 ccw(c23.368,31.623) 23.368,32.004 19.304,32.004 ccw(c19.304,31.623) 18.923,31.623 18.923,30.226 ccw(c19.431,30.226) 19.431,29.718 21.59,29.718 cw(c21.59,29.21) 22.098,29.21 22.098,26.035 21.844,26.035 21.844,20.701 20.193,20.701
  region net Vusb: 24.384,13.97 27.051,13.97 29.718,13.97 29.718,15.494 ccw(c29.21,15.494) 29.21,16.002 27.686,16.002 cw(c27.686,16.637) 27.051,16.637 27.051,18.161 24.892,18.161 ccw(c24.892,17.653) 24.384,17.653 24.384,16.002 cw(c23.876,16.002) 23.876,15.494 18.348,15.494 ccw(c18.348,15.307) 18.161,15.307 cw(c17.967,15.307) 17.967,15.113 13.97,15.113 cw(c13.97,15.494) 13.589,15.494 13.589,17.526 ccw(c13.208,17.526) 13.208,17.907 12.954,17.907 ccw(c12.954,17.526) 12.573,17.526 12.573,14.351 ccw(c12.954,14.351) 12.954,13.97
  region net GND: 21.209,13.462 26.538,13.462 cw(c26.538,12.949) 27.051,12.949 27.051,8.763 cw(c26.543,8.763) 26.543,8.255 25.146,8.255 cw(c25.146,8.89) 24.511,8.89 24.511,10.16 ccw(c24.003,10.16) 24.003,10.668 21.082,10.668

## Silkscreen, mask and mechanical layers (free items; w line width, h text height)
Top Overlay:
  lines w0.2: 6.731,20.193 18.796,20.193 18.796,27.813 ; 9.872,56.529 ccw(c12.845,57.277) 10.677,55.109 cw(c9.779,54.211) 11.049,54.211 11.049,51.689 ; 12.319,56.529 12.319,55.784 ccw(c13.62,55.784) 12.7,54.864 cw(c11.474,53.638) 13.208,53.638 13.208,52.197 ; 14.859,56.529 14.859,55.657 ccw(c16.16,55.657) 15.24,54.737 cw(c14.627,54.124) 15.494,54.124 15.494,52.324 ; 17.399,54.991 17.399,56.529 ; 19.304,53.467 19.304,54.452 cw(c20.605,54.452) 19.685,55.372 ccw(c19.072,55.985) 19.939,55.985 19.939,56.529 ; 21.59,54.483 21.59,54.96 cw(c22.891,54.96) 21.971,55.88 ccw(c20.745,57.106) 22.382,56.534 ; 23.495,52.832 23.495,53.839 cw(c25.663,53.839) 24.13,55.372 ccw(c21.984,57.518) 24.858,56.542 ; 26.543,54.61 26.543,54.96 cw(c27.844,54.96) 26.924,55.88 ccw(c25.698,57.106) 27.341,56.553 ; 28.702,52.451 28.702,52.705 cw(c31.768,52.705) 29.6,54.873 29.718,54.991 ccw(c28.798,55.911) 30.099,55.911 30.099,56.529
  text "JTAG-20P" at 2.626,60.848 h2 r90
  text "3V3" at 11.643,48.406 h2 r90
  text "TXD" at 13.802,48.406 h2 r90
  text "RXD" at 15.962,48.406 h2 r90
  text "RESET" at 18.166,48.406 h2 r90
  text "SWIM" at 20.37,48.406 h2 r90
  text "SWDIO" at 22.574,48.406 h2 r90
  text "SWO" at 24.778,48.406 h2 r90
  text "SWCLK" at 26.982,48.406 h2 r90
  text "GND" at 29.169,48.406 h2 r90
  text "STM8" at 17.545,38.776 h2
  text "STLINK V2" at 29.169,36.468 h2 r90
  text "STLINK V3 minie" at 11.643,33.674 h2 r90
  text "PROG" at 17.993,32.023 h2 r90
  text "RXD" at 10.941,30.499 h2
  text "REG" at 23.327,29.864 h2 r90
  text "GND" at 15.64,27.981 h2
  text "RX" at 15.64,25.662 h2
  text "TX" at 15.64,23.343 h2
  text "UART" at 8.468,22.879 h2 r90
  text "TXD" at 10.947,22.466 h2
  text "3V3" at 15.64,20.996 h2
  text "3V3" at 23.241,20.828 h2 r90
  text "CheapPRJ" at 28.835,16.148 h2 r90
  text "STM Interface V1.1" at 10.287,15.113 h2
  text "github.com/aKaReZa75" at 10.287,13.246 h1.8
  text "BLUEPILL" at 8.468,9.417 h2 r90

## Text inside footprints (layer, text, board x,y; h text height)
J1: Mechanical 13 "PCB EDGE" at 26.015,-0.332 h0.8 r180
P1: Top Overlay "9" at 7.227,48.317 h0.8 r90; Top Overlay "10" at 4.687,48.317 h0.8 r90; Top Overlay "1" at 7.227,34.241 h0.8 r90; Top Overlay "2" at 4.687,33.741 h0.8 r90
P2: Top Overlay "2" at 6.649,65.764 h1.02; Top Overlay "1" at 6.949,63.224 h1.02; Top Overlay "20" at 32.629,65.824 h1.02; Top Overlay "19" at 32.629,63.284 h1.02
P4: Top Overlay "9" at 32.27,13.365 h0.8 r270; Top Overlay "10" at 34.81,13.365 h0.8 r270; Top Overlay "1" at 32.27,27.441 h0.8 r270; Top Overlay "2" at 34.81,27.941 h0.8 r270
P7: Top Overlay "9" at 32.27,34.701 h0.8 r270; Top Overlay "10" at 34.81,34.701 h0.8 r270; Top Overlay "1" at 32.27,48.777 h0.8 r270; Top Overlay "2" at 34.81,49.277 h0.8 r270